# Altium PCB STS_BODY.00.PcbDoc
Units mm, origin at the board's own origin, x right, y up, seen from the top; angles counter-clockwise.
Board outline 80.7 x 49.1 mm, 2 copper layers (Top Layer, Bottom Layer), stack 0.971 mm thick; 1 components, 4 nets, 6 pads, 0 vias.
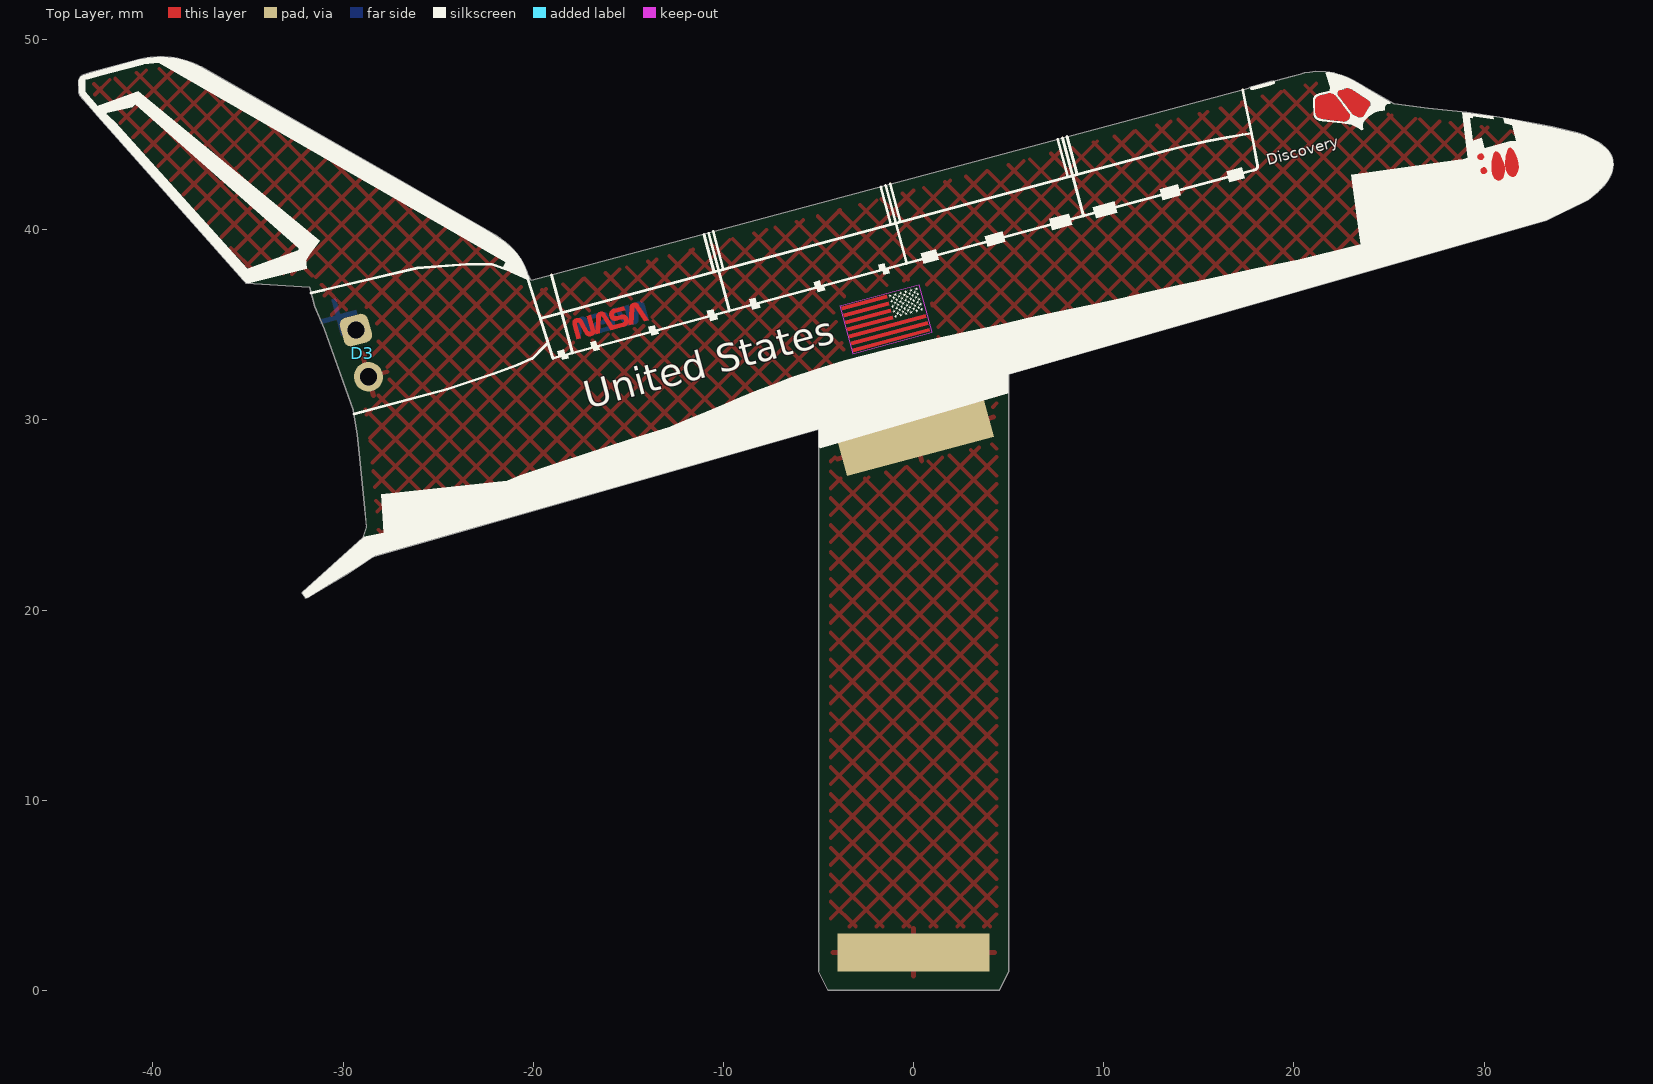
[diagram p0: Top Layer view]
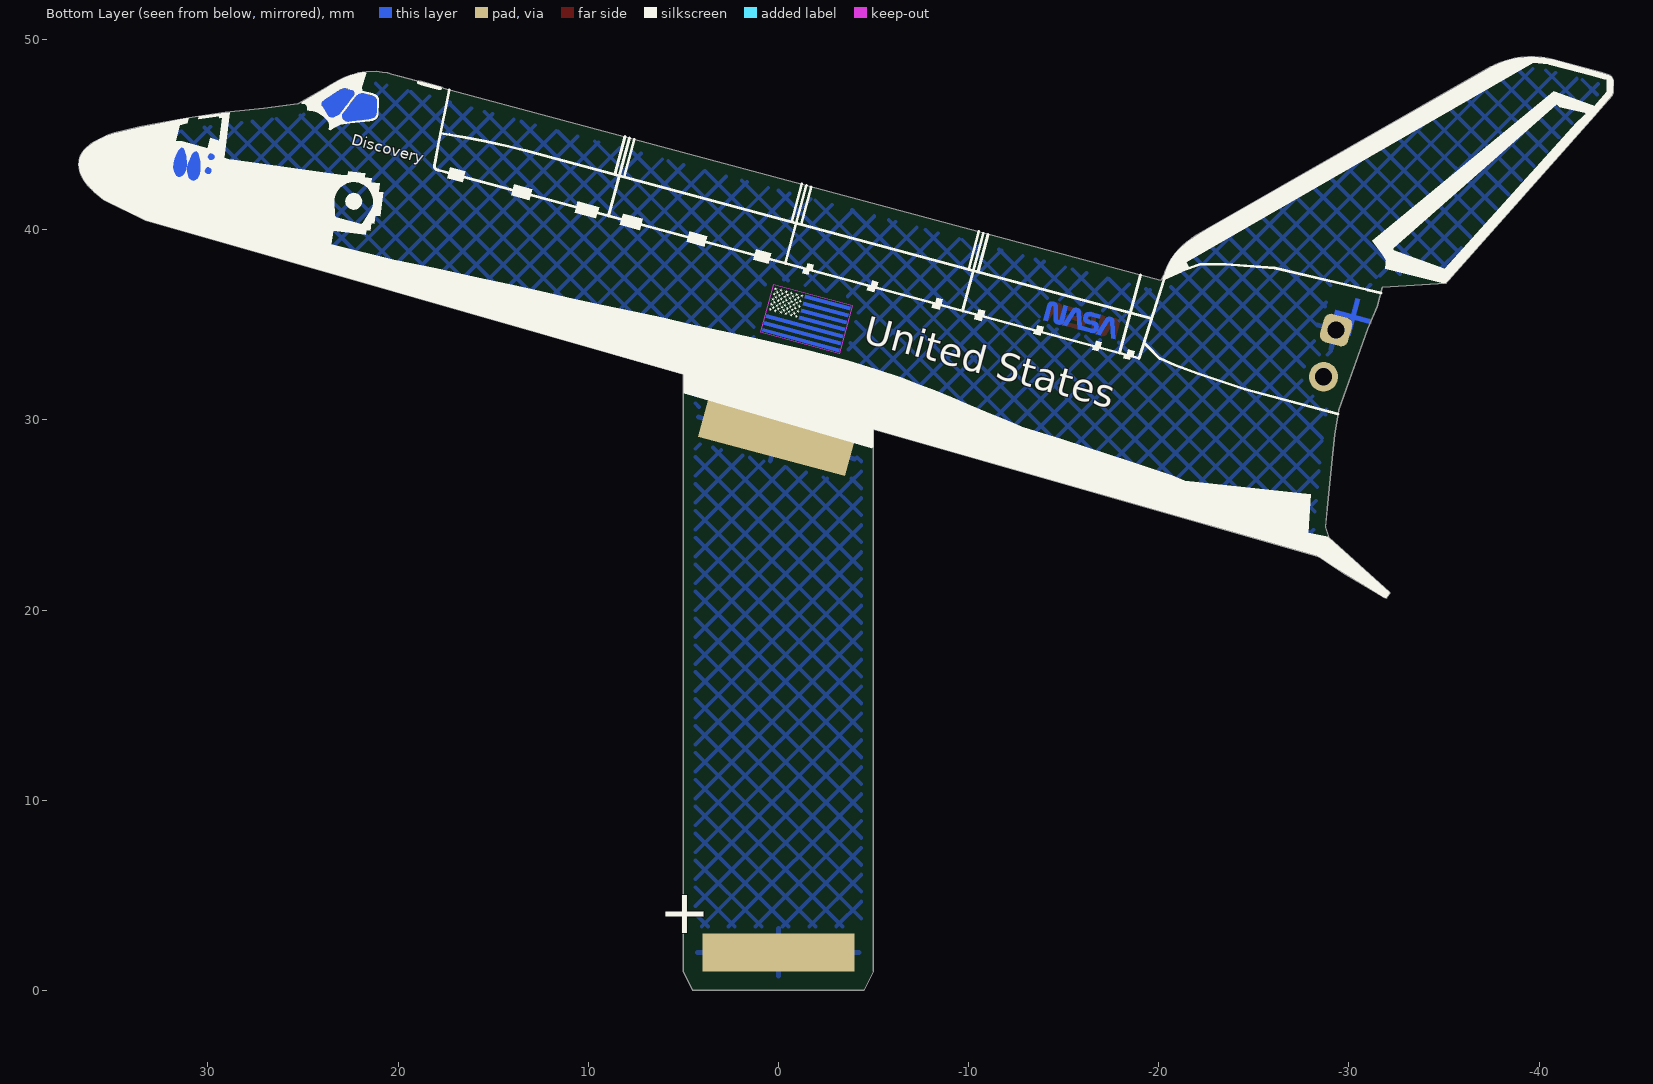
[diagram p1: Bottom Layer view, seen from below]

## Layer stack, top to bottom
Top Solder: solder mask 0.0102, Solder Resist, Dk 3.5
Top Layer: signal copper 0.0356
Dielectric1: core 0.9, FR-4, Dk 4.8
Bottom Layer: signal copper 0.0356
Bottom Solder: solder mask 0.0102, Solder Resist, Dk 3.5

## Board outline
-31.983,20.632 -32.14,20.858 -32.145,20.932 -28.955,23.816 -28.771,24.37 -28.865,25.33 -29.151,28.236 -29.246,29.22 -29.462,30.515 -30.993,34.792 -31.489,35.969 -31.763,36.971 -35.109,37.197 -35.285,37.395 -35.42,37.539 -42.91,45.996 -43.229,46.348 -43.844,47.075 -43.894,47.219 -43.907,47.866 -43.889,47.929 -43.863,47.986 -43.825,48.037 -43.778,48.081 -43.726,48.116 -43.666,48.143 -43.277,48.277 -40.701,48.967 -40.483,49.017 cw(c-39.596,44.66) -37.68,48.672 -37.487,48.574 -37.461,48.564 -22.563,40.054 -21.889,39.652 -21.723,39.542 cw(c-23.878,36.382) -20.528,38.229 -20.437,38.052 -20.35,37.834 -20.269,37.587 -20.129,37.359 -20.085,37.348 17.62,47.451 17.689,47.487 17.777,47.528 18.786,47.798 18.913,47.824 19.026,47.828 19.924,48.068 20.334,48.19 20.549,48.247 20.823,48.292 21.148,48.329 21.659,48.306 21.878,48.283 22.118,48.245 22.512,48.138 22.838,48.009 23.108,47.872 23.526,47.625 23.797,47.465 25.073,46.728 25.266,46.628 27.05,46.4 29.093,46.175 30.664,45.949 31.454,45.819 32.628,45.592 33.596,45.408 34.924,45.099 35.238,44.991 cw(c33.199,40) 36.008,44.602 cw(c34.671,42.453) 36.37,44.329 cw(c35.391,43.24) 36.644,43.997 cw(c35.811,43.497) 36.777,43.601 36.796,43.434 36.774,43.253 cw(c35.226,43.508) 36.525,42.628 cw(c34.181,44.145) 36.314,42.344 cw(c33.304,44.879) 36.076,42.085 cw(c32.326,45.859) 35.833,41.858 35.474,41.567 33.276,40.496 5,32.396 5,1 4.5,0 -4.5,0 -5,1 -5,29.505 -28.325,22.836 -28.475,22.773 -29.165,22.302 -29.861,21.865 -31.07,21.133 -31.84,20.676 -31.908,20.637

## Design rules (kind name [scope] priority, off if disabled: settings)
BoardOutlineClearance BoardOutlineClearance_silk [OnLayer('Top Overlay') OR OnLayer('Bottom Overlay')] p1: gap=0 ignorepadtopadclearanceinfootprint=FALSE except(0.01: Poly-OutlineEdge)
BoardOutlineClearance BoardOutlineClearance_1 [NOT OnLayer('Top Overlay') AND NOT OnLayer('Bottom Overlay') AND NOT IsText] p2: gap=0.5 ignorepadtopadclearanceinfootprint=FALSE except(0: Arc-SplitContinuation Track-SplitContinuation SMDPad-SplitContinuation THPad-SplitContinuation Via-SplitContinuation Fill-SplitContinuation Poly-SplitContinuation Region-SplitContinuation Text-SplitContinuation)
Clearance [All] p1: gap=0.15 ignorepadtopadclearanceinfootprint=FALSE except(0: Arc-Hole Track-Hole SMDPad-Hole THPad-Hole Via-Hole Fill-Hole Poly-Hole Region-Hole Text-Hole; 0.3: Arc-Poly Track-Poly THPad-Poly Via-Poly Fill-Poly; 1.1: Poly-Poly)
DiffPairsRouting [All] p1: maxlimit=0.254 minlimit=0.254 mostfreqgap=0.254 toplayer_minwidth=0.2 toplayer_maxwidth=0.381 toplayer_prefwidth=0.381 bottomlayer_minwidth=0.2 bottomlayer_maxwidth=0.381 bottomlayer_prefwidth=0.381 maxuncoupledlength=12.7
HoleSize [All] p1: absolutevalues=TRUE maxlimit=10 minlimit=0.025 maxpercent=80.000 minpercent=20.000
PolygonConnect PolygonConnect_VIA [IsVia] p1: connectstyle=Direct reliefconductorwidth=0.254 reliefentries=4 polygonreliefangle="90 Angle" airgapwidth=0.254
PolygonConnect [All] p2: connectstyle=Relief reliefconductorwidth=0.254 reliefentries=4 polygonreliefangle="90 Angle" airgapwidth=0.254
RoutingVias [All] p1: holewidth=0.3 width=0.7 viastyle="Through Hole" minholewidth=0.3 minwidth=0.2 maxholewidth=0.6 maxwidth=1.2
SilkToSolderMaskClearance SilkscreenOverComponentPads [IsPad] p1: minsilkscreentomaskgap=0.254 clearancetoexposedcopper=TRUE
SolderMaskExpansion [All] p1: expansion=0.05 istentingtop=FALSE
Width [All] p1: maxlimit=5 minlimit=0.15 preferedwidth=0.25
27 further rules are at their usual default settings.

## Components (designator, comment, footprint, x,y, rotation, side; value= is the part's Value field where it differs from the comment)
D3 "Default 5mm Red LED" LED_5MM_RD -29,33.5 r285 top (schematic designator D?)

## Footprints (in the part's own frame and the unit in brackets; to place one, negate y for a bottom-side part, rotate by r counter-clockwise, add the part's x,y. Pads: shape width x height; smd on the part's side, far side on the other; paste and mask are expansions set on the pad)
LED_5MM_RD [mm] "5mm LED RED"
  rrect50% 1.55x1.524 hole 0.9: 1(-1.27,0)
  oval 1.55x1.524 hole 0.9: 2(1.27,0)
  body extent -2.98,-10.15 2.44,4.65, height 3.01

## Part data
D3: library part "LED Red 5mm", "=Description", Supplier Part Number 1=2335725, Supplier 1=Farnell

## Free pads (board coordinates)
  rect 8x2 smd far side: 0(0,2)
  rect 8x2 smd: 0(0,2)
  rect 8x2 smd far side rot 15: 0(0.1,29.05)
  rect 8x2 smd rot 15: 0(0.1,29.05)

## Nets (pads, with @x,y where several pads share a name; then routed paths per layer and width w, separated by ;. In a path a pad name is that pad's centre, name@x,y a point inside that pad or via, vN(x,y) a via of type N, cw(c..) or ccw(c..) an arc to the next point about the centre after c; other vN are vias at no path point)
ANODE: 
CATHODE: 
GND: D3.2 pad.0@0,2 pad.0@0.1,29.05 | length 1.1
  Top Layer w0.01: 29.813,43.128 cw(c29.982,43.108) 30.068,43.255 30.121,43.211 30.148,43.151 30.155,43.083 30.131,43.021 30.088,42.972 30.027,42.941 29.964,42.936 29.9,42.956 29.847,43.001 29.816,43.062 29.813,43.128
VBAT: D3.1 pad.0@0,2 pad.0@0.1,29.05

## Polygon pours and split planes (outlines as drawn)
no net on Top Overlay "NONET_L-01_P-001" (solid): 17.689,47.487 17.715,47.378 17.745,47.357 17.773,47.352 17.882,47.363 18.215,47.446 18.771,47.6 18.912,47.65 18.964,47.68 18.992,47.709 18.995,47.737 18.979,47.789 18.959,47.846 18.335,47.887
no net on Top Overlay "NONET_L-01_P-001" (solid): 20.15,38.41 19.427,38.265 17.983,37.972 16.819,37.722 15.755,37.49 14.881,37.302 13.988,37.096 12.462,36.757 10.797,36.384 9.309,36.065 7.525,35.684 6.025,35.376 4.729,35.071 2.635,34.605 0.963,34.24 -0.176,33.989 -1.364,33.706 -3.627,33.127 -5.137,32.669 -6.425,32.25 -7.443,31.844 -8.225,31.552 -9.121,31.189 -9.907,30.852 -10.912,30.44 -11.686,30.116 -12.498,29.763 -12.797,29.643 -14.922,28.971 -18.566,27.792 -20.694,27.096 -21.371,26.804 -27.985,26.09 -27.858,24.072 -29.125,23.825 -33.25,20.85 -32.05,19.875 -27.7,21.95 -11.2,25.575 -5,28.485 5,31.396 14.525,31.1 20.35,33.475
no net on Top Overlay "NONET_L-01_P-001" (solid): 21.66,48.303 21.913,47.487 21.875,47.3 21.325,47.175 21.2,47.125 21.1,47.05 21.05,46.975 21.025,46.9 21.02,46.75 21.05,46.06 21.1,45.9 21.175,45.825 21.325,45.725 21.5,45.7 22.55,45.6 23.05,45.525 23.35,45.375 23.679,45.173 23.635,45.287 23.608,45.437 23.615,45.532 23.648,45.642 23.738,45.78 23.768,45.809 23.947,45.979 24.224,46.15 24.363,46.199 24.469,46.229 24.576,46.253 24.671,46.27 24.769,46.284 24.767,46.363 24.78,46.425 24.803,46.524 24.892,46.599 24.97,46.621 25.061,46.631 25.168,46.633 25.406,46.675 25.575,47.45 23.275,48.725
no net on Top Overlay "NONET_L-01_P-001" (solid): 23.021,42.906 23.409,39.955 23.504,39.234 20.124,38.41 19.427,38.275 19.975,35.425 28.25,37.3 36.725,41.15 37.2,42.9 36.95,44.675 34.45,45.925 31.025,46.2 31.005,45.883 31.073,45.597 31.484,45.501 31.702,44.642 31.35,44.661 30.019,44.298 29.876,44.831 29.412,44.68 29.239,45.89 29.408,45.87 29.392,45.963 30.496,45.803 30.475,46.075 28.85,46.35 28.864,46.171 29.152,43.793 28.906,43.716 28.653,43.683
no net on Top Overlay "NONET_L-01_P-001" (solid): -43.107,46.436 -40.78,47.283 -31.232,39.43 -31.747,38.706 -32,38.361 -32.329,38.93 -32.336,39.021 -40.93,46.593 -41.103,46.442 -42.409,46.149 -42.667,45.872
no net on Top Overlay "NONET_L-01_P-001" (solid): -20.085,37.348 -21.605,37.984 -21.437,38.291 -39.692,48.794 -40.481,48.696 -40.541,48.688 -40.704,48.645 -41.469,48.44 -42.775,48.09 -43.406,47.921 -43.562,47.878 -43.569,47.257 -42.904,46.502 -41.987,45.651 -35.046,37.948 -32.294,38.942 -32.065,38.75 -31.973,38.537 -31.924,37.955 -35.093,37.167 -37,37 -46.5,46.5 -45,48.5 -41.382,49.514 -37.5,49.5 -20.5,40.457 -19.555,38.5
GND on Top Layer "T_G" (hatched 45Degree grid 1 track 0.2, remove dead copper, pour order 0): -44.975,50.1 40.35,50.1 40.35,0 -44.975,0
no net on Bottom Overlay "NONET_L-01_P-001" (solid): 17.689,47.487 17.715,47.378 17.745,47.357 17.773,47.352 17.882,47.363 18.215,47.446 18.771,47.6 18.912,47.65 18.964,47.68 18.992,47.709 18.995,47.737 18.979,47.789 18.959,47.846 18.335,47.887
no net on Bottom Overlay "NONET_L-01_P-001" (solid): -20.085,37.348 -21.605,37.984 -21.437,38.291 -39.692,48.794 -40.481,48.696 -40.541,48.688 -40.704,48.645 -41.469,48.44 -42.775,48.09 -43.406,47.921 -43.562,47.878 -43.569,47.257 -42.904,46.502 -41.987,45.651 -35.046,37.948 -32.294,38.942 -32.065,38.75 -31.973,38.537 -31.924,37.955 -35.093,37.167 -37,37 -46.5,46.5 -45,48.5 -41.382,49.514 -37.5,49.5 -20.5,40.457 -19.555,38.5
no net on Bottom Overlay "NONET_L-01_P-001" (solid): -43.107,46.436 -40.78,47.283 -31.232,39.43 -31.747,38.706 -32,38.361 -32.329,38.93 -32.336,39.021 -40.93,46.593 -41.103,46.442 -42.409,46.149 -42.667,45.872
no net on Bottom Overlay "NONET_L-01_P-001" (solid): 21.66,48.303 21.913,47.487 21.875,47.3 21.325,47.175 21.2,47.125 21.1,47.05 21.05,46.975 21.025,46.9 21.02,46.75 21.05,46.06 21.1,45.9 21.175,45.825 21.325,45.725 21.5,45.7 22.55,45.6 23.05,45.525 23.35,45.375 23.679,45.173 23.635,45.287 23.608,45.437 23.615,45.532 23.648,45.642 23.738,45.78 23.768,45.809 23.947,45.979 24.224,46.15 24.363,46.199 24.469,46.229 24.576,46.253 24.671,46.27 24.769,46.284 24.767,46.363 24.78,46.425 24.803,46.524 24.892,46.599 24.97,46.621 25.061,46.631 25.168,46.633 25.406,46.675 25.575,47.45 23.275,48.725
no net on Bottom Overlay "NONET_L-01_P-001" (solid): 20.15,38.41 19.427,38.265 17.983,37.972 16.819,37.722 15.755,37.49 14.881,37.302 13.988,37.096 12.462,36.757 10.797,36.384 9.309,36.065 7.525,35.684 6.025,35.376 4.729,35.071 2.635,34.605 0.963,34.24 -0.176,33.989 -1.364,33.706 -3.627,33.127 -5.137,32.669 -6.425,32.25 -7.443,31.844 -8.225,31.552 -9.121,31.189 -9.907,30.852 -10.912,30.44 -11.686,30.116 -12.498,29.763 -12.797,29.643 -14.922,28.971 -18.566,27.792 -20.694,27.096 -21.371,26.804 -27.985,26.09 -27.858,24.072 -29.125,23.825 -33.25,20.85 -32.05,19.875 -27.7,21.95 -11.2,25.575 -5,28.485 5,31.396 14.525,31.1 20.35,33.475
no net on Bottom Overlay "NONET_L-01_P-001" (solid): 23.021,42.906 22.637,42.859 22.607,43.081 21.732,42.972 21.763,42.75 21.391,42.702 21.42,42.495 20.966,42.437 21.022,42.009 20.781,41.976 20.947,40.712 21.187,40.744 21.243,40.328 21.415,40.35 21.467,39.936 21.667,39.963 21.695,39.749 23.409,39.955 23.504,39.234 20.124,38.41 19.427,38.275 19.975,35.425 28.25,37.3 36.725,41.15 37.2,42.9 36.95,44.675 34.45,45.925 31.025,46.2 31.005,45.883 31.073,45.597 31.484,45.501 31.702,44.642 31.35,44.661 30.019,44.298 29.876,44.831 29.412,44.68 29.239,45.89 29.408,45.87 29.392,45.963 30.496,45.803 30.475,46.075 28.85,46.35 28.864,46.171 29.152,43.793 28.906,43.716 28.653,43.683
VBAT on Bottom Layer "B_VBAT" (hatched 45Degree grid 1 track 0.2, remove dead copper, pour order 1): -45.025,49.95 40.65,49.95 40.65,0 -45.025,0

## Keep-outs
Top Layer:
  lines w0.034: -3.874,35.992 0.272,37.103 0.942,34.603 -3.204,33.492 -3.874,35.992
Bottom Layer:
  lines w0.034: -3.874,35.992 -3.204,33.492 0.942,34.603 0.272,37.103 -3.874,35.992

## Other copper
Top Layer:
  region: 2025 vertices and 0 holes, not listed, extent -17.938,34.242 -16.748,35.52
  region: 3105 vertices and 0 holes, not listed, extent -16.728,34.507 -14.987,35.985
  region: 1034 vertices and 0 holes, not listed, extent -14.967,34.979 -13.941,36.158
  region net GND: 184 vertices and 0 holes, not listed, extent 22.299,45.92 24.024,47.436
  region net GND: 213 vertices and 0 holes, not listed, extent 21.119,45.691 22.943,47.18
  region net GND: 29.847,43.001 29.9,42.956 29.964,42.936 30.027,42.941 30.088,42.972 30.131,43.021 30.155,43.083 30.148,43.151 30.121,43.211 30.068,43.255 ccw(c29.982,43.108) 29.813,43.128 29.816,43.062
  region net GND: 29.655,43.87 29.677,43.932 29.775,44.01 29.841,44.016 29.907,43.996 29.96,43.952 29.991,43.89 29.997,43.825 cw(c29.826,43.847)
  region net GND: 31.126,43.322 cw(c32.91,43.485) 31.12,43.569 cw(c33.501,43.463) 31.182,44.014 31.239,44.216 31.296,44.296 31.344,44.314 31.401,44.309 31.492,44.24 31.561,44.148 31.664,43.945 31.745,43.731 31.803,43.504 31.812,43.273 31.771,43.047 31.729,42.942 31.659,42.853 31.565,42.793 31.456,42.784 31.351,42.829 31.268,42.909 cw(c31.884,43.353)
  region: -3.216,33.755 0.81,34.834 0.859,34.651 -3.167,33.572
  region: -3.314,34.121 0.712,35.2 0.761,35.017 -3.265,33.938
  region: -3.412,34.487 0.614,35.566 0.663,35.383 -3.363,34.304
  region: -3.51,34.853 -1.131,35.49 -1.082,35.307 -3.461,34.67
  region: -3.608,35.219 -1.229,35.856 -1.18,35.673 -3.559,35.036
  region: -3.706,35.585 -1.327,36.222 -1.278,36.039 -3.657,35.402
  region: -3.804,35.951 -1.425,36.588 -1.376,36.405 -3.755,35.768
  region net GND: 29.4,44.5 29.923,44.165 30.363,44.233 31.2,44.5 31.8,44.4 32.028,44.21 32.149,43.758 32.362,43.148 32.2,42.4 31.9,42.1 31.4,42 30.6,42 30.19,42.176 29.823,42.282 29.488,42.72 29.404,43.076 29.379,43.277
  region net GND: 30.442,42.915 30.401,43.143 30.394,43.375 30.415,43.602 30.457,43.817 30.515,44.022 30.576,44.102 30.623,44.121 30.681,44.113 30.77,44.041 30.838,43.951 30.94,43.745 31.023,43.531 31.077,43.307 31.087,43.076 31.045,42.852 31.003,42.747 30.936,42.66 30.841,42.599 30.733,42.591 30.628,42.633 30.544,42.709
Bottom Layer:
  region: 1034 vertices and 0 holes, not listed, extent -17.717,34.242 -16.691,35.421
  region: 3105 vertices and 0 holes, not listed, extent -16.964,34.576 -14.93,35.893
  region: 2025 vertices and 0 holes, not listed, extent -15.228,35.016 -13.941,36.224
  region net VBAT: 29.847,43.001 29.9,42.956 29.964,42.936 30.027,42.941 30.088,42.972 30.131,43.021 30.155,43.083 30.148,43.151 30.121,43.211 30.068,43.255 ccw(c29.982,43.108) 29.813,43.128 29.816,43.062
  region net VBAT: 29.655,43.87 29.677,43.932 29.775,44.01 29.841,44.016 29.907,43.996 29.96,43.952 29.991,43.89 29.997,43.825 cw(c29.826,43.847)
  region net VBAT: 31.126,43.322 cw(c32.91,43.485) 31.12,43.569 cw(c33.501,43.463) 31.182,44.014 31.239,44.216 31.296,44.296 31.344,44.314 31.401,44.309 31.492,44.24 31.561,44.148 31.664,43.945 31.745,43.731 31.803,43.504 31.812,43.273 31.771,43.047 31.729,42.942 31.659,42.853 31.565,42.793 31.456,42.784 31.351,42.829 31.268,42.909 cw(c31.884,43.353)
  region net VBAT: 213 vertices and 0 holes, not listed, extent 21.119,45.692 22.943,47.181
  region net VBAT: 184 vertices and 0 holes, not listed, extent 22.299,45.92 24.024,47.436
  region: -3.804,35.951 -1.425,36.588 -1.376,36.405 -3.755,35.768
  region: -3.706,35.585 -1.327,36.222 -1.278,36.039 -3.657,35.402
  region: -3.608,35.219 -1.229,35.856 -1.18,35.673 -3.559,35.036
  region: -3.51,34.853 -1.131,35.49 -1.082,35.307 -3.461,34.67
  region: -3.412,34.487 0.614,35.566 0.663,35.383 -3.363,34.304
  region: -3.314,34.121 0.712,35.2 0.761,35.017 -3.265,33.938
  region: -3.216,33.755 0.81,34.834 0.859,34.651 -3.167,33.572
  region net VBAT: 30.442,42.915 30.401,43.143 30.394,43.375 30.415,43.602 30.457,43.817 30.515,44.022 30.576,44.102 30.623,44.121 30.681,44.113 30.77,44.041 30.838,43.951 30.94,43.745 31.023,43.531 31.077,43.307 31.087,43.076 31.045,42.852 31.003,42.747 30.936,42.66 30.841,42.599 30.733,42.591 30.628,42.633 30.544,42.709
  region net VBAT: 29.4,44.5 29.923,44.165 30.363,44.233 31.2,44.5 31.8,44.4 32.028,44.21 32.149,43.758 32.362,43.148 32.2,42.4 31.9,42.1 31.4,42 30.6,42 30.19,42.176 29.823,42.282 29.488,42.72 29.404,43.076 29.379,43.277
  text "+" at -29.396,37.456 h4 r195

## Silkscreen, mask and mechanical layers (free items; w line width, h text height)
Top Overlay:
  drawing of 114 lines, arcs and shapes, not listed
  text "Discovery" at 18.691,43.178 h1 r15
  text "United States" at -17,30.1 h2.5 r15
Bottom Overlay:
  drawing of 116 lines, arcs and shapes, not listed
  text "Discovery" at 22.55,44.3 h1 r15
  text "United States" at -4.262,33.608 h2.5 r15
  text "+" at 3.579,2.24 h4
Top Solder:
  region: -3.804,35.951 -1.425,36.588 -1.082,35.305 0.565,35.746 0.859,34.651 -3.167,33.572
  region: 20.175,22.295
  region: 30.646,19.638
  region: 18.086,22.632
  region: -26.152,24.208
Bottom Solder:
  region: -30.549,36.097 ccw(c-29.8,36.298) -29.599,35.549 ccw(c-29.8,36.298) -29.051,36.499 ccw(c-29.8,36.298) -30.001,37.047 ccw(c-29.8,36.298)
  region: -3.804,35.951 -1.425,36.588 -1.082,35.305 0.565,35.746 0.859,34.651 -3.167,33.572
Outline:
  the board outline again, w0.1
Comments:
  lines w0.1: -5,1 5,1
Route Tool Path (Mech30):
  lines w0.15: -18.958,33.238 17.315,42.984

## Dimensions
-38.443,23.233 to 38.912,41.636 on Fabrication
-4.5,0 to 27.303,41.893 on Fabrication